# Altium PCB Smart_Farm_PCB.pcbdoc (part 1 of 2)
Units mm, origin at the board's own origin, x right, y up, seen from the top; angles counter-clockwise.
Board outline 238 x 152.38 mm, 2 copper layers (Top Layer, Bottom Layer); 109 components, 81 nets, 498 pads, 409 vias.
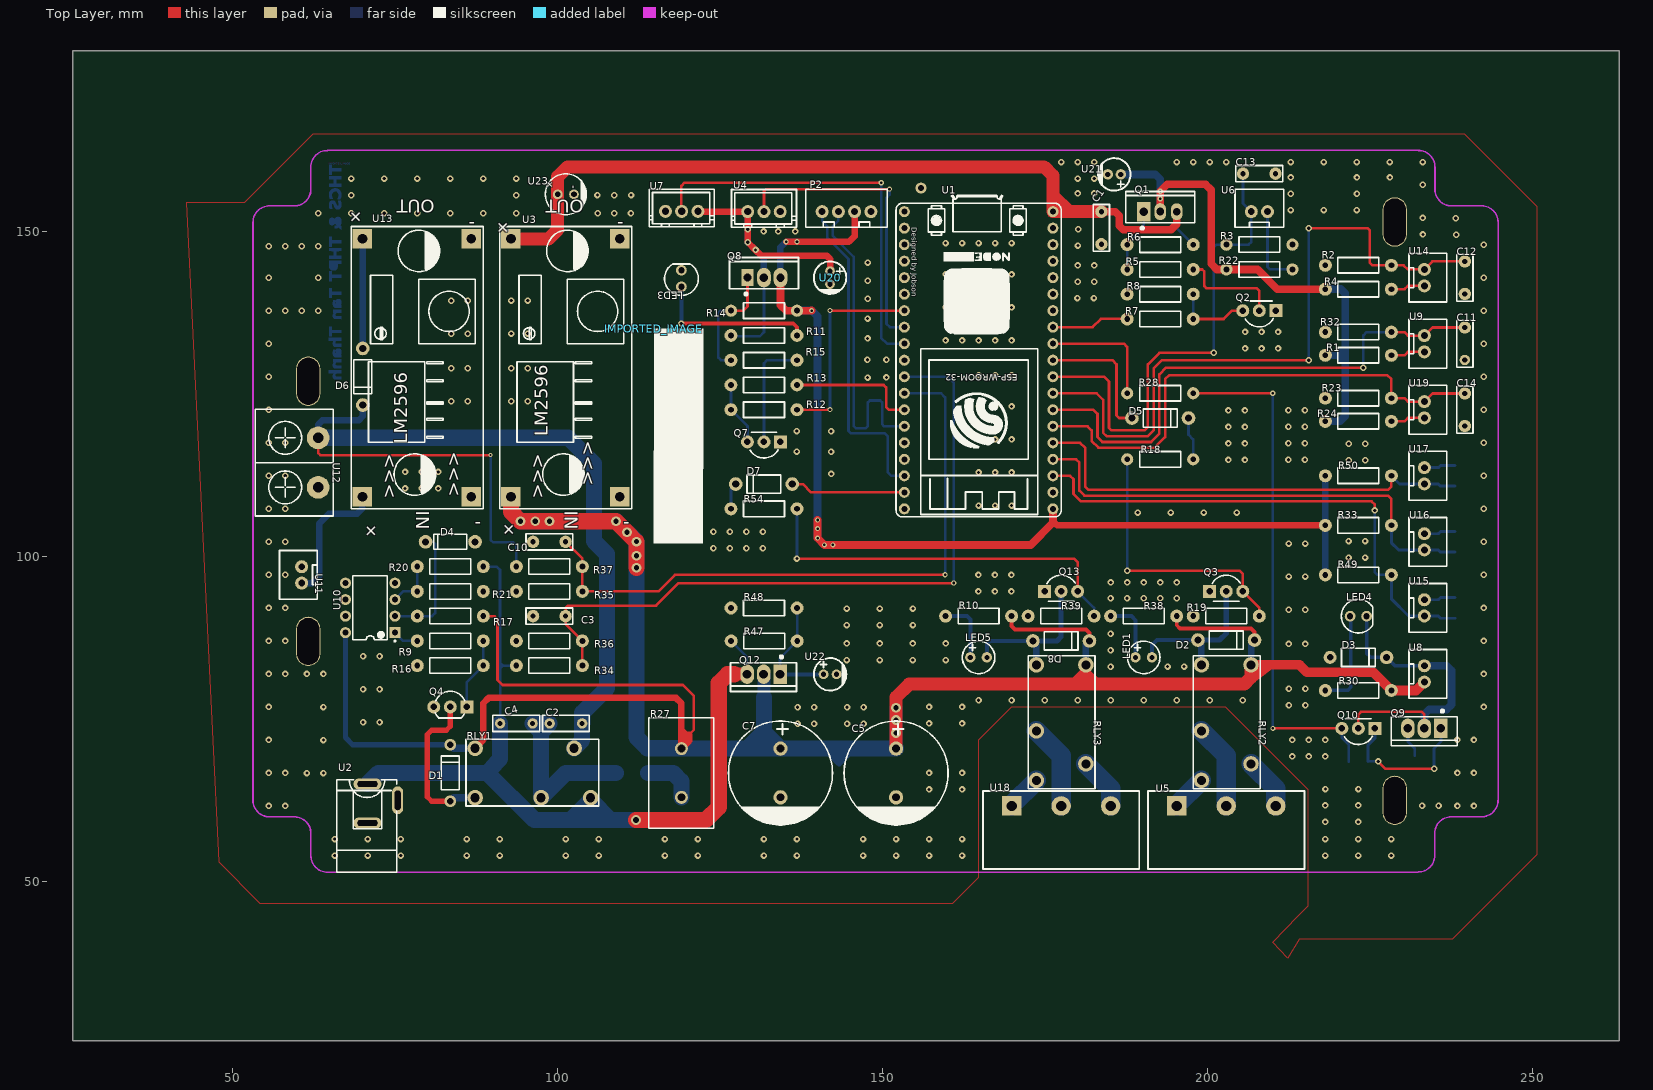
[diagram p0: Top Layer view]
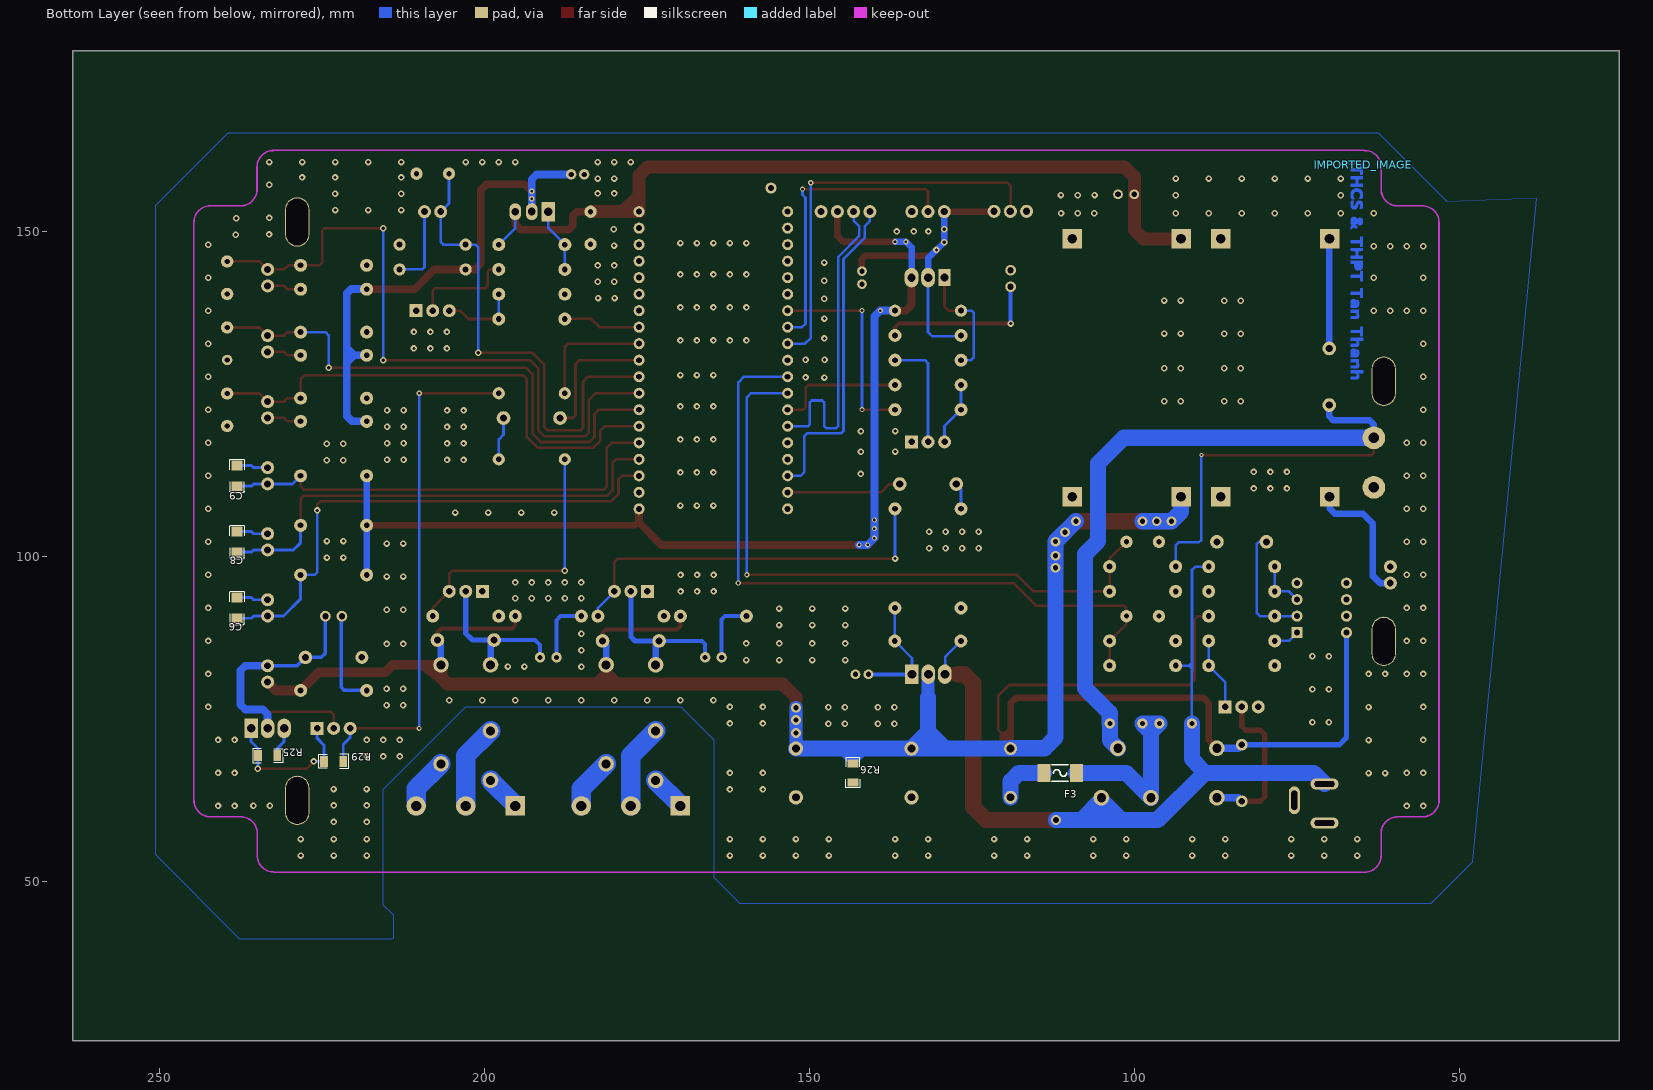
[diagram p1: Bottom Layer view, seen from below]

## Layer stack, top to bottom
Top Layer: signal copper (thickness not stored)
Dielectric: dielectric 0.32, FR-4, Dk 4.8
Bottom Layer: signal copper (thickness not stored)

## Board outline
263.4,25.4 25.4,25.4 25.4,177.78 263.4,177.78

## Components (designator, comment, footprint, x,y, rotation, side; value= is the part's Value field where it differs from the comment)
C1 "100nF" CAP-TH_L7.2-W2.5-P5.00-D0.5#1 183.69,150.48 r90 top
C2 "100nF" CAP-TH_L7.2-W2.5-P5.00-D0.5#1 101.3,74.25 r0 top
C3 "100nF" CAP-TH_L7.2-W2.5-P5.00-D0.5#1 98.76,90.76 r0 top
C4 "100nF" CAP-TH_L7.2-W2.5-P5.00-D0.5#1 93.68,74.25 r180 top
C5 "2200uF" CAP-TH_BD16.0-P7.50-D1.2-FD 152.1,66.63 r270 top
C6 "0.1u" C1206 238.079,92.03 r90 bottom
C7 "2200uF" CAP-TH_BD16.0-P7.50-D1.2-FD 134.32,66.63 r270 top
C8 "0.1u" C1206 238.079,102.19 r90 bottom
C9 "0.1u" C1206 238.079,112.35 r90 bottom
C10 "100nF" CAP-TH_L7.2-W2.5-P5.00-D0.5#1 98.76,102.19 r0 top
C11 "100nF" CAP-TH_L7.2-W2.5-P5.00-D0.5#1 239.603,132.67 r90 top
C12 "100nF" CAP-TH_L7.2-W2.5-P5.00-D0.5#1 239.603,142.83 r90 top
C13 "100nF" CAP-TH_L7.2-W2.5-P5.00-D0.5#1 207.98,158.832 r180 top
C14 "100nF" CAP-TH_L7.2-W2.5-P5.00-D0.5#2 239.603,122.51 r90 top
D1 "1N4007-T" DO-41_BD2.4-L4.7-P8.70-D0.9-RD#1 83.52,66.63 r270 top
D2 "1N4007-T" DO-41_BD2.4-L4.7-P8.70-D0.9-RD#1 202.9,87.077 r180 top
D3 "1N4007" DO-41_BD2.4-L4.7-P8.70-D0.9-RD#2 223.22,84.41 r180 top
D4 "1N5237B" DO-35 83.52,102.19 r180 top
D5 "1N4007" DO-41_BD2.4-L4.7-P8.70-D0.9-RD#1 192.74,121.235 r180 top
D6 "1N4007" DO-41_BD2.4-L4.7-P8.70-D0.9-RD#1 70.058,127.59 r90 top
D7 "1N4007" DO-41_BD2.4-L4.7-P8.70-D0.9-RD#1 131.78,111.08 r0 top
D8 "1N4007-T" DO-41_BD2.4-L4.7-P8.70-D0.9-RD#1 177.5,86.95 r180 top
F3 "SMD1808-5A保险" FUSE-SMD_L6.1-W2.5 111.46,66.63 r180 bottom
IMPORTED_IMAGE "IMPORTED_IMAGE" IMPORTED_IMAGE#1 114.817,134.997 r0 top
IMPORTED_IMAGE "IMPORTED_IMAGE" IMPORTED_IMAGE#2 64.81,160.17 r0 bottom
LED1 "LED-TH-5mm_B" LED-TH_BD5.0_BLUE 190.2,84.41 r90 top
LED3 "LED-TH-5mm_R" LED-TH_BD5.0_RED 119.08,142.703 r180 top
LED4 "LED-TH-5mm_R" LED-TH_BD5.0_RED 223.22,90.76 r90 top
LED5 "LED-TH-5mm_B" LED-TH_BD5.0_BLUE 164.8,84.41 r90 top
P2 "XH-2.54-4P" CONN-TH_4P-P2.50-XH2.54-4P 144.48,152.99 r180 top
Q1 "IRF9Z34" TO-220-3_L10.0-W4.5-P2.54-L 192.74,152.985 r0 top
Q2 "C1815" TO-92-3_L4.8-W3.7-P2.54-L#1 207.98,137.75 r180 top
Q3 "KSC2383YTA" TO-92-3_L4.8-W3.7-P2.54-L#1 202.9,94.57 r0 top
Q4 "2SC2383" TO-92-3_L4.8-W3.7-P2.54-R 83.52,76.79 r0 top
Q7 "C1815" TO-92-3_L4.8-W3.7-P2.54-L#2 131.78,117.562 r180 top
Q8 "IRF9Z34" TO-220-3_L10.0-W4.5-P2.54-L 131.78,142.83 r0 top
Q9 "TIP41C" TO-220-3_L10.0-W4.5-P2.54-T 233.38,73.488 r270 top
Q10 "C1815" TO-92-3_L4.8-W3.7-P2.54-L#3 223.22,73.488 r180 top
Q12 "TIP42C" TO-220-3_L10.0-W4.5-P2.54-T 131.7,81.83 r270 top
Q13 "KSC2383YTA" TO-92-3_L4.8-W3.7-P2.54-L#1 177.5,94.57 r0 top
R1 "33k" R_AXIAL-0.4#1 223.22,130.892 r180 top
R2 "47k" R_AXIAL-0.4#1 223.22,144.735 r0 top
R3 "47k" R_AXIAL-0.4#1 208,147.91 r180 top
R4 "33k" R_AXIAL-0.4#1 223.22,141.052 r180 top
R5 "100" R_AXIAL-0.4#1 192.74,144.095 r180 top
R6 "10k" R_AXIAL-0.4#1 192.74,147.905 r0 top
R7 "3k3" R_AXIAL-0.4#1 192.74,140.285 r180 top
R8 "1k" R_AXIAL-0.4#1 192.74,136.475 r0 top
R9 "3k3" R_AXIAL-0.4#1 83.52,86.95 r0 top
R10 "1k" R_AXIAL-0.4#1 164.8,90.76 r0 top
R11 "220" R_AXIAL-0.4#1 131.78,133.945 r180 top
R12 "1k" R_AXIAL-0.4#1 131.78,122.515 r180 top
R13 "3k3" R_AXIAL-0.4#1 131.78,126.325 r0 top
R14 "10k" R_AXIAL-0.4#1 131.78,137.755 r0 top
R15 "100" R_AXIAL-0.4#1 131.78,130.135 r180 top
R16 "1k" R_AXIAL-0.4#1 83.52,83.14 r0 top
R17 "270" R_AXIAL-0.4#2 83.52,90.76 r180 top
R18 "1k" R_AXIAL-0.4#1 192.74,114.885 r180 top
R19 "2k4" R_AXIAL-0.4#1 202.9,90.76 r0 top
R20 "22k" R_AXIAL-0.4#1 83.52,98.38 r0 top
R21 "33k" R_AXIAL-0.4#2 83.52,94.57 r180 top
R22 "33k" R_AXIAL-0.4#1 208,144.1 r180 top
R23 "47k" R_AXIAL-0.4#1 223.22,124.288 r0 top
R24 "33k" R_AXIAL-0.4#1 223.22,120.732 r180 top
R25 "10k" R1206 233.38,69.297 r180 bottom
R26 "1M" R1206 143.337,66.63 r270 bottom
R27 "Hongzhi" RES-TH_L17.0-W10.0-P7.50-D1.2 119.08,66.63 r90 top
R28 "1k" R_AXIAL-0.4#1 192.74,125.045 r0 top
R29 "3k3" R1206 223.22,68.408 r0 bottom
R30 "330" R_AXIAL-0.4#1 223.22,79.33 r180 top
R32 "47k" R_AXIAL-0.4#1 223.22,134.448 r0 top
R33 "10k" R_AXIAL-0.4#1 223.22,104.73 r180 top
R34 "33k" R_AXIAL-0.4#1 98.76,83.14 r180 top
R35 "10k" R_AXIAL-0.4#1 98.76,94.57 r0 top
R36 "10k" R_AXIAL-0.4#1 98.76,86.95 r0 top
R37 "33k" R_AXIAL-0.4#1 98.76,98.38 r180 top
R38 "1k" R_AXIAL-0.4#1 190.2,90.76 r0 top
R39 "2k4" R_AXIAL-0.4#1 177.5,90.76 r0 top
R47 "100k" R_AXIAL-0.4#1 131.81,86.93 r0 top
R48 "1M" R_AXIAL-0.4#1 131.79,92.01 r180 top
R49 "10k" R_AXIAL-0.4#1 223.22,97.11 r180 top
R50 "10k" R_AXIAL-0.4#1 223.22,112.35 r180 top
R54 "1k" R_AXIAL-0.4#1 131.78,107.27 r0 top
RLY1 "JQ1P-12V-F" RELAY-TH_JQ1P-5V-F 96.22,66.63 r0 top
RLY2 "JQ1P-12V-F" RELAY-TH_JQ1P-5V-F 202.9,74.377 r270 top
RLY3 "JQ1P-12V-F" RELAY-TH_JQ1P-5V-F 177.5,74.377 r270 top
U1 "NodeMCU-32S" NODEMCU-32SLUA 164.8,130.13 r180 top
U2 "POWER-JACK" DC-IN-TH_POWER-JACK 73.106,61.931 r90 top
U3 "LM2596 MODULE" ? 111.46,107.27 r90 top
U4 "XH_2.54_3P" CONN-TH_XH2.54-3P#1 131.78,152.99 r180 top
U5 "KF7.62-3P" CONN-TH_KF7.62-3P 202.9,61.55 r0 top
U6 "XH2.54-2p" CONN-TH_2P-P2.50-XH2.54-2P#1 208,152.99 r180 top
U7 "XH_2.54_3P" CONN-TH_XH2.54-3P#2 119.12,153.04 r180 top
U8 "XH2.54-2p" CONN-TH_2P-P2.50-XH2.54-2P#1 233.38,81.87 r90 top
U9 "XH2.54-2p" CONN-TH_2P-P2.50-XH2.54-2P#1 233.38,132.67 r90 top
U10 "LM358GN" DIP-8_L9.8-W6.6-P2.54-LS7.6-BL 71.201,92.03 r90 top
U11 "XH2.54-2p" CONN-TH_2P-P2.50-XH2.54-2P#2 60.66,97.11 r270 top
U12 "KF7.62" CONN-TH_KF7.62-2P 63.2,114.382 r270 top
U13 "LM2596 MODULE" ? 88.6,107.27 r90 top
U14 "XH2.54-2p" CONN-TH_2P-P2.50-XH2.54-2P#1 233.38,142.83 r90 top
U15 "XH2.54-2p" CONN-TH_2P-P2.50-XH2.54-2P#1 233.38,92.03 r90 top
U16 "XH2.54-2p" CONN-TH_2P-P2.50-XH2.54-2P#1 233.38,102.19 r90 top
U17 "XH2.54-2p" CONN-TH_2P-P2.50-XH2.54-2P#1 233.38,112.35 r90 top
U18 "KF7.62-3P" CONN-TH_KF7.62-3P 177.5,61.55 r0 top
U19 "XH2.54-2p" CONN-TH_2P-P2.50-XH2.54-2P#1 233.38,122.51 r90 top
U20 "100uF" CAP-TH_BD5.0-P2.00-D0.8-FD#1 141.94,142.83 r270 top
U21 "100uF" CAP-TH_BD5.0-P2.00-D0.8-FD#2 185.68,158.72 r180 top
U22 "100uF" CAP-TH_BD5.0-P2.00-D0.8-FD#1 141.95,81.81 r0 top
U23 "220uF" CAP-TH_BD6.3-P2.50-D0.5-FD 101.3,155.657 r0 top

## Footprints (in the part's own frame and the unit in brackets; to place one, negate y for a bottom-side part, rotate by r counter-clockwise, add the part's x,y. Pads: shape width x height; smd on the part's side, far side on the other; paste and mask are expansions set on the pad)
C1206 [mm]
  rect 1.485x1.728 smd paste-100 mask+0.051: 1(1.593,0) 2(-1.593,0)
  silkscreen extent -2.56,-1.09 2.56,1.09
CAP-TH_BD5.0-P2.00-D0.8-FD#1 [mm]
  round 1.3 hole 0.8 paste+0 mask+0.051: 1(-1,0) 2(1,0)
  silkscreen extent -2.5,-2.5 2.5,2.5
CAP-TH_BD5.0-P2.00-D0.8-FD#2 [mm]
  round 1.6 hole 0.8 paste+0 mask+0.051: 1(-1,0) 2(1,0)
  silkscreen extent -2.5,-2.5 2.5,2.5
CAP-TH_BD6.3-P2.50-D0.5-FD [mm]
  round 1.5 hole 0.9 paste+0 mask+0.05: 1(-1.25,0) 2(1.25,0)
  silkscreen extent -3.15,-3.15 3.21,3.15
CAP-TH_BD16.0-P7.50-D1.2-FD [mm]
  round 2.2 hole 1.2 paste+0 mask+0.051: 1(-3.75,0) 2(3.75,0)
  silkscreen extent -8,-8 8,8
CAP-TH_L7.2-W2.5-P5.00-D0.5#1 [mm]
  round 1.6 hole 0.8 paste+0 mask+0.05: 1(-2.5,0) 2(2.5,0)
  silkscreen extent -3.6,-1.25 3.6,1.25
CAP-TH_L7.2-W2.5-P5.00-D0.5#2 [mm]
  round 1.9 hole 0.8 paste+0 mask+0.05: 1(-2.5,0)
  round 1.6 hole 0.8 paste+0 mask+0.05: 2(2.5,0)
  silkscreen extent -3.6,-1.25 3.6,1.25
CONN-TH_2P-P2.50-XH2.54-2P#1 [mm]
  round 1.7 hole 1.05 paste+0 mask+0.05: 1(1.25,0) 2(-1.25,0)
  silkscreen extent -3.75,-3.42 3.75,2.37
CONN-TH_2P-P2.50-XH2.54-2P#2 [mm]
  round 1.7 hole 1.05 paste+0 mask+0.05: 1(1.25,0)
  round 2 hole 1.05 paste+0 mask+0.05: 2(-1.25,0)
  silkscreen extent -3.75,-3.42 3.75,2.37
CONN-TH_4P-P2.50-XH2.54-4P [mm]
  round 2 hole 1.05 paste+0 mask+0.05: 1(3.75,0) 2(1.25,0) 3(-1.25,0) 4(-3.75,0)
  silkscreen extent -6.25,-3.42 6.25,2.37
CONN-TH_KF7.62-2P [mm]
  round 3.5 hole 1.6 paste+0 mask+0.051: 1(-3.81,0) 2(3.81,0)
  silkscreen extent -8.22,-9.7 8.22,2.3
CONN-TH_KF7.62-3P [mm]
  rect 3x3 hole 1.6 paste+0 mask+0.051: 1(-7.62,0)
  round 3 hole 1.6 paste+0 mask+0.051: 2(0,0) 3(7.62,0)
  silkscreen extent -12.03,-9.7 12.03,2.3
CONN-TH_XH2.54-3P#1 [mm]
  round 1.65 hole 1.1 paste+0 mask+0.05: 1(-2.5,0) 2(0,0)
  round 2 hole 1.1 paste+0 mask+0.05: 3(2.5,0)
  silkscreen extent -5,-3.4 5,2.4
CONN-TH_XH2.54-3P#2 [mm]
  round 2 hole 1.1 paste+0 mask+0.05: 1(-2.5,0) 3(2.5,0)
  round 1.65 hole 1.1 paste+0 mask+0.05: 2(0,0)
  silkscreen extent -5,-3.4 5,2.4
DC-IN-TH_POWER-JACK [mm]
  oval 1.7x4.3 hole 0.9 slot 3.1 at 90 deg paste+0 mask+0.051: 1(3.001,2.325) 2(-3,2.325)
  oval 4.3x1.7 hole 0.9 slot 3 at 0 deg paste+0 mask+0.051: 3(0.5,-2.324)
  silkscreen extent -10.6,-2.2 3.65,7.05
DIP-8_L9.8-W6.6-P2.54-LS7.6-BL [mm]
  rect 1.7x1.7 hole 0.9 paste+0 mask+0.051: 1(-3.81,-3.81)
  round 1.5 hole 0.9 paste+0 mask+0.051: 2(-1.27,-3.81) 3(1.27,-3.81) 4(3.81,-3.81) 8(-3.81,3.81)
  round 1.7 hole 0.9 paste+0 mask+0.051: 5(3.81,3.81) 6(1.27,3.81) 7(-1.27,3.81)
  silkscreen extent -5.23,-3.93 4.96,2.65
DO-35 [mm]
  round 2.1 hole 1.1 paste+0 mask+0.051: 1(-3.81,0)
  round 1.905 hole 1.1 paste+0 mask+0.051: 2(3.81,0)
  silkscreen extent -2.54,-1.14 2.54,1.14
DO-41_BD2.4-L4.7-P8.70-D0.9-RD#1 [mm]
  round 1.8 hole 1 paste+0 mask+0.051: 1(-4.35,0) 2(4.35,0)
  silkscreen extent -2.6,-1.4 2.6,1.4
DO-41_BD2.4-L4.7-P8.70-D0.9-RD#2 [mm]
  round 1.8 hole 1 paste+0 mask+0.051: 1(-4.35,0)
  round 2 hole 1 paste+0 mask+0.051: 2(4.35,0)
  silkscreen extent -2.6,-1.4 2.6,1.4
FUSE-SMD_L6.1-W2.5 [mm]
  rect 2x2.8 smd paste+0 mask+0.051: 1(2.5,0) 2(-2.5,0)
  silkscreen extent -1.27,-1.25 1.27,1.25
IMPORTED_IMAGE#1 [mm]
  silkscreen extent 0,-32.99 7.64,0
IMPORTED_IMAGE#2 [mm]
  Top Layer region: 1.914,33 1.055,32.997 1.014,32.987 0.992,32.982 0.972,32.976 0.953,32.971 0.935,32.964 0.918,32.957 0.9,32.95 0.883,32.942 0.865,32.932 0.822,32.908 0.787,32.875 0.774,32.862 0.762,32.848 0.749,32.833 0.738,32.818 0.728,32.804 0.719,32.792 0.714,32.782 0.712,32.776 0.71,32.77 0.705,32.763 0.697,32.749 0.688,32.726 0.68,32.699 0.674,32.671 0.671,32.657 0.667,32.64 0.663,32.624 0.659,32.609 0.65,32.576 0.651,32.404 0.66,32.379 0.663,32.368 0.667,32.354 0.67,32.341 0.672,32.329 0.676,32.307 0.682,32.291 0.688,32.277 0.693,32.26 0.698,32.244 0.704,32.234 0.71,32.226 0.714,32.215 0.725,32.194 0.745,32.161 0.769,32.126 0.788,32.102 0.795,32.09 0.799,32.077 0.801,32.064 0.013,32.061 0,32.043 0,31.84 0.001,31.638 0.01,31.613 1.91,31.613 1.921,31.641 1.921,32.04 1.91,32.061 1.542,32.061 1.174,32.061 1.147,32.08 1.134,32.089 1.119,32.101 1.104,32.115 1.09,32.128 1.059,32.158 1.038,32.202 1.026,32.226 1.023,32.234 1.016,32.258 1.009,32.297 1.002,32.347 1.015,32.441 1.029,32.464 1.036,32.475 1.045,32.486 1.055,32.497 1.064,32.506 1.086,32.525 1.157,32.549 1.535,32.551 1.912,32.552 1.921,32.566 1.921,32.763 1.921,32.802 1.92,32.841 1.92,32.876 1.92,32.908 1.919,32.935 1.919,32.956 1.918,32.972 1.917,32.98
  Top Layer region: 1.907,31.307 1.475,31.304 1.044,31.302 0.997,31.289 0.969,31.281 0.948,31.275 0.932,31.27 0.92,31.265 0.912,31.262 0.892,31.253 0.88,31.246 0.871,31.241 0.863,31.237 0.854,31.232 0.841,31.223 0.826,31.212 0.81,31.2 0.795,31.187 0.78,31.174 0.768,31.163 0.76,31.153 0.751,31.141 0.742,31.129 0.734,31.118 0.726,31.107 0.721,31.098 0.716,31.09 0.713,31.085 0.712,31.081 0.71,31.075 0.704,31.068 0.698,31.058 0.693,31.042 0.688,31.025 0.682,31.011 0.675,30.992 0.669,30.961 0.667,30.945 0.664,30.931 0.661,30.919 0.659,30.913 0.654,30.903 0.648,30.753 0.653,30.72 0.655,30.706 0.657,30.693 0.66,30.681 0.663,30.672 0.668,30.652 0.672,30.627 0.676,30.603 0.682,30.586 0.689,30.572 0.694,30.555 0.698,30.539 0.704,30.529 0.711,30.519 0.715,30.506 0.719,30.492 0.724,30.483 0.733,30.47 0.748,30.448 0.756,30.435 0.765,30.422 0.774,30.41 0.782,30.402 0.794,30.387 0.801,30.373 0.805,30.36 0.79,30.351 0.675,30.351 0.672,30.338 0.67,30.318 0.67,30.272 0.67,30.206 0.67,30.129 0.672,29.932 0.68,29.919 1.909,29.919 1.918,29.932 1.92,30.121 1.92,30.16 1.92,30.197 1.92,30.232 1.92,30.263 1.92,30.29 1.919,30.313 1.919,30.329 1.918,30.339 1.915,30.367 1.179,30.367 1.162,30.376 1.145,30.387 1.127,30.399 1.11,30.414 1.093,30.43 1.078,30.447 1.064,30.464 1.053,30.48 1.044,30.496 1.032,30.521 1.022,30.54 1.019,30.549 1.015,30.565 1.012,30.585 1.009,30.608 1.002,30.662 1.015,30.75 1.03,30.773 1.038,30.784 1.046,30.794 1.055,30.803 1.063,30.811 1.072,30.819 1.082,30.825 1.092,30.831 1.103,30.837 1.13,30.85 1.521,30.852 1.912,30.855 1.916,30.869 1.918,30.89 1.919,30.938 1.92,31.005 1.92,31.085 1.921,31.287
  Top Layer region: 218 vertices and 1 holes, not listed, extent 0.65,28.241 1.939,29.612
  Top Layer region: 1.907,27.983 1.475,27.98 1.044,27.978 0.997,27.965 0.969,27.957 0.948,27.951 0.932,27.946 0.92,27.941 0.912,27.938 0.892,27.929 0.88,27.922 0.871,27.918 0.863,27.914 0.854,27.908 0.841,27.9 0.826,27.889 0.81,27.876 0.795,27.863 0.78,27.85 0.768,27.839 0.76,27.83 0.751,27.817 0.742,27.806 0.734,27.794 0.726,27.784 0.721,27.774 0.716,27.767 0.713,27.761 0.712,27.757 0.71,27.751 0.704,27.745 0.698,27.734 0.693,27.718 0.688,27.701 0.682,27.688 0.675,27.668 0.669,27.637 0.667,27.621 0.663,27.606 0.66,27.594 0.657,27.586 0.651,27.575 0.651,27.38 0.659,27.361 0.666,27.34 0.671,27.314 0.676,27.29 0.682,27.273 0.688,27.259 0.693,27.242 0.698,27.226 0.704,27.216 0.71,27.208 0.712,27.2 0.716,27.188 0.726,27.173 0.735,27.158 0.739,27.15 0.742,27.144 0.748,27.136 0.757,27.126 0.765,27.116 0.772,27.107 0.779,27.099 0.784,27.092 0.789,27.085 0.793,27.079 0.796,27.074 0.798,27.069 0.8,27.065 0.8,27.061 0.8,27.058 0.8,27.055 0.798,27.053 0.796,27.05 0.794,27.049 0.783,27.043 0.007,27.043 0.003,27.023 0.002,26.999 0.001,26.951 0.001,26.888 0.001,26.817 0.001,26.746 0.002,26.683 0.003,26.637 0.005,26.614 0.008,26.598 1.907,26.595 1.918,26.607 1.92,26.797 1.92,26.835 1.92,26.873 1.92,26.907 1.92,26.939 1.92,26.966 1.919,26.989 1.919,27.005 1.918,27.015 1.915,27.043 1.179,27.043 1.162,27.053 1.145,27.063 1.127,27.076 1.11,27.09 1.093,27.106 1.078,27.123 1.064,27.14 1.053,27.157 1.044,27.172 1.032,27.197 1.022,27.216 1.019,27.225 1.015,27.241 1.012,27.262 1.009,27.284 1.002,27.338 1.015,27.427 1.03,27.449 1.038,27.461 1.046,27.471 1.055,27.48 1.063,27.488 1.072,27.495 1.082,27.501 1.092,27.508 1.103,27.513 1.13,27.526 1.521,27.529 1.912,27.531 1.916,27.545 1.918,27.566 1.919,27.614 1.92,27.681 1.92,27.761 1.921,27.964
  Top Layer region: 0.468,26.362 0.463,26.369 0.097,26.369 0.086,26.341 0.087,25.622 0.087,24.904 0.098,24.885 0.463,24.885 0.472,24.898 0.478,25.395 1.91,25.397 1.921,25.425 1.921,25.823 1.91,25.851 0.478,25.853 0.472,26.355
  Top Layer region: 1.917,23.678 1.914,23.698 1.055,23.695 1.014,23.685 0.992,23.68 0.972,23.674 0.953,23.668 0.935,23.662 0.918,23.655 0.9,23.648 0.883,23.639 0.865,23.63 0.822,23.606 0.787,23.572 0.774,23.56 0.762,23.546 0.749,23.531 0.738,23.516 0.728,23.502 0.719,23.49 0.714,23.48 0.712,23.474 0.71,23.468 0.705,23.461 0.697,23.447 0.688,23.424 0.68,23.397 0.674,23.369 0.671,23.355 0.668,23.34 0.664,23.325 0.661,23.312 0.653,23.284 0.651,23.22 0.65,23.206 0.65,23.192 0.65,23.177 0.65,23.163 0.651,23.15 0.651,23.137 0.652,23.127 0.653,23.118 0.655,23.102 0.657,23.087 0.66,23.075 0.662,23.067 0.667,23.048 0.672,23.021 0.674,23.008 0.676,22.995 0.68,22.985 0.689,22.964 0.694,22.947 0.698,22.931 0.705,22.92 0.71,22.914 0.712,22.906 0.717,22.893 0.729,22.87 0.748,22.84 0.773,22.806 0.804,22.763 0.792,22.748 0.678,22.745 0.674,22.732 0.672,22.712 0.671,22.667 0.67,22.603 0.67,22.529 0.669,22.339 0.68,22.311 1.91,22.311 1.921,22.339 1.921,22.738 1.91,22.759 1.542,22.759 1.174,22.759 1.147,22.777 1.134,22.787 1.119,22.799 1.104,22.813 1.09,22.826 1.059,22.856 1.038,22.9 1.026,22.924 1.023,22.932 1.016,22.956 1.009,22.995 1.002,23.045 1.015,23.139 1.029,23.162 1.036,23.172 1.045,23.184 1.055,23.195 1.064,23.204 1.086,23.222 1.157,23.247 1.535,23.249 1.912,23.25 1.921,23.263 1.921,23.46 1.921,23.5 1.92,23.538 1.92,23.574 1.92,23.605 1.919,23.633 1.919,23.654 1.918,23.67
  Top Layer region: 196 vertices and 1 holes, not listed, extent 0.648,20.632 1.939,21.998
  Top Layer region: 0.468,20.448 0.463,20.455 0.097,20.455 0.086,20.427 0.087,19.709 0.087,18.99 0.098,18.971 0.463,18.971 0.472,18.985 0.478,19.481 1.91,19.484 1.921,19.511 1.921,19.909 1.91,19.937 0.478,19.94 0.472,20.441
  Top Layer region: 0.466,17.865 0.461,17.871 0.095,17.868 0.091,17.854 0.09,17.835 0.09,17.788 0.089,17.715 0.089,17.621 0.088,17.511 0.088,17.388 0.088,17.257 0.087,17.122 0.087,16.987 0.087,16.856 0.087,16.734 0.088,16.624 0.088,16.531 0.089,16.459 0.089,16.411 0.09,16.393 0.093,16.387 0.468,16.387 0.472,16.395 0.473,16.417 0.474,16.471 0.475,16.549 0.475,16.643 0.475,16.691 0.475,16.737 0.475,16.778 0.476,16.814 0.476,16.845 0.477,16.869 0.477,16.884 0.478,16.891 0.481,16.899 1.91,16.899 1.921,16.92 1.92,17.121 1.92,17.162 1.92,17.201 1.919,17.236 1.919,17.268 1.918,17.294 1.918,17.315 1.917,17.329 1.916,17.336 1.912,17.35 1.195,17.352 0.478,17.355 0.472,17.859
  Top Layer region: 128 vertices and 1 holes, not listed, extent 0.086,14.741 1.921,16.23
  Top Layer region: 0.098,14.417 0.089,14.404 0.087,14.195 0.086,13.986 0.098,13.964 0.793,13.964 0.796,13.952 0.796,13.942 0.797,13.919 0.797,13.885 0.798,13.84 0.798,13.787 0.798,13.726 0.798,13.66 0.797,13.589 0.796,13.238 0.445,13.237 0.095,13.236 0.087,13.222 0.087,13.02 0.087,12.979 0.088,12.922 0.088,12.872 0.089,12.834 0.09,12.81 0.09,12.803 0.092,12.788 1.914,12.788 1.917,12.808 1.919,12.831 1.92,12.88 1.92,12.947 1.921,13.025 1.921,13.222 1.912,13.236 1.551,13.237 1.19,13.238 1.188,13.589 1.188,13.66 1.188,13.742 1.188,13.815 1.188,13.875 1.189,13.919 1.189,13.946 1.19,13.952 1.193,13.964 1.91,13.964 1.921,13.986 1.92,14.195 1.918,14.404 1.909,14.417
  Top Layer region: 0.468,12.549 0.463,12.556 0.097,12.556 0.086,12.528 0.087,11.809 0.087,11.091 0.098,11.072 0.463,11.072 0.472,11.085 0.478,11.582 1.194,11.583 1.91,11.585 1.921,11.612 1.921,12.01 1.91,12.038 0.478,12.04 0.472,12.542
  Top Layer region: 283 vertices and 2 holes, not listed, extent 0.067,7.996 1.939,9.938
  Top Layer region: 324 vertices and 0 holes, not listed, extent 0.067,5.471 1.939,6.815
  Top Layer region: 286 vertices and 0 holes, not listed, extent 0.067,3.609 1.939,5.249
  Top Layer region: 1.914,3.339 1.909,3.345 0.098,3.345 0.089,3.332 0.087,3.123 0.086,2.914 0.098,2.892 0.793,2.892 0.796,2.88 0.796,2.87 0.797,2.848 0.797,2.813 0.798,2.768 0.798,2.715 0.798,2.654 0.798,2.588 0.797,2.517 0.796,2.166 0.095,2.164 0.087,2.15 0.087,1.948 0.087,1.907 0.088,1.85 0.088,1.801 0.089,1.762 0.09,1.738 0.09,1.731 0.092,1.716 1.914,1.716 1.917,1.736 1.919,1.759 1.92,1.808 1.92,1.875 1.921,1.953 1.921,2.15 1.912,2.164 1.19,2.166 1.188,2.517 1.188,2.588 1.188,2.67 1.188,2.743 1.188,2.803 1.189,2.848 1.189,2.874 1.19,2.88 1.193,2.892 1.91,2.892 1.921,2.914 1.92,3.123 1.918,3.332
  Top Layer region: 0.468,1.477 0.463,1.484 0.097,1.484 0.086,1.456 0.087,0.737 0.087,0.019 0.098,0 0.463,0 0.472,0.013 0.478,0.51 1.91,0.513 1.921,0.54 1.921,0.938 1.91,0.966 0.478,0.969 0.472,1.47
LED-TH_BD5.0_BLUE [mm]
  round 1.4 hole 0.8 paste+0 mask+0.051: 1(0,1.27) 2(0,-1.27)
  silkscreen extent -2.5,-2.5 2.5,2.5
LED-TH_BD5.0_RED [mil]
  round 65 hole 38 paste+0 mask+2: 1(0,50) 2(0,-50)
  silkscreen extent -102,-88 102,102
NODEMCU-32SLUA [mil]
  round 60 hole 36 paste+0 mask+4: 1(-450,-900) 2(-450,-800) 3(-450,-700) 4(-450,-600) 5(-450,-500) 7(-450,-300) 8(-450,-200) 9(-450,-100) 10(-450,0) 11(-450,100) 12(-450,200) 13(-450,300) 14(-450,400) 15(-450,500) 16(-450,600) 17(-450,700) 18(-450,800) 19(-450,900) 20(450,-900) 21(450,-800) 22(450,-700) 23(450,-600) 24(450,-500) 25(450,-400) 26(450,-300) 27(450,-200) 28(450,-100) 29(450,0) 30(450,100) 31(450,200) 32(450,300) 33(450,400) 34(450,500) 35(450,600) 36(450,700) 37(450,800)
  round 66.93 hole 35.98 paste+0 mask+4.02: 6(-449.99,-399.99) 38(450.01,900)
  silkscreen extent -500,-999 500,949
R1206 [mm]
  rect 1.208x1.701 smd paste-100 mask+0.051: 1(1.479,0) 2(-1.479,0)
  silkscreen extent -2.31,-1.08 2.31,1.08
R_AXIAL-0.4#1 [mil]
  round 74 hole 35.4 paste+0 mask+2: 1(-200,0) 2(200,0)
  silkscreen extent -124,-47 124,47
R_AXIAL-0.4#2 [mil]
  round 78.74 hole 35.39 paste+0 mask+2.01: 1(-200,0)
  round 74 hole 35.4 paste+0 mask+2: 2(200,0)
  silkscreen extent -124,-47 124,47
RELAY-TH_JQ1P-5V-F [mm]
  round 1.9 hole 1.4 paste+0 mask+0.051: 1(-8.89,-3.81) 2(-8.89,3.81) 3(6.35,3.81) 4(1.27,-3.81) 5(8.89,-3.81)
  silkscreen extent -10.29,-5.08 10.16,5.21
RES-TH_L17.0-W10.0-P7.50-D1.2 [mm]
  round 2 hole 1.2 paste+0 mask+0.051: 1(-3.749,0) 2(3.749,0)
  silkscreen extent -8.5,-5 8.5,5
TO-92-3_L4.8-W3.7-P2.54-L#1 [mm]
  rect 1.8x1.8 hole 1 paste+0 mask+0.051: 1(-2.54,0)
  round 1.8 hole 1 paste+0 mask+0.051: 2(0,0) 3(2.54,0)
  silkscreen extent -2.17,-1.5 2.14,2.48
TO-92-3_L4.8-W3.7-P2.54-L#2 [mm]
  rect 2x2 hole 1 paste+0 mask+0.051: 1(-2.54,0)
  round 1.8 hole 1 paste+0 mask+0.051: 2(0,0) 3(2.54,0)
  silkscreen extent -2.17,-1.5 2.14,2.48
TO-92-3_L4.8-W3.7-P2.54-L#3 [mm]
  rect 1.8x1.8 hole 1 paste+0 mask+0.051: 1(-2.54,0)
  round 1.8 hole 1 paste+0 mask+0.051: 2(0,0)
  round 2 hole 1 paste+0 mask+0.051: 3(2.54,0)
  silkscreen extent -2.17,-1.5 2.14,2.48
TO-92-3_L4.8-W3.7-P2.54-R [mm]
  rect 1.8x1.8 hole 1 paste+0 mask+0.051: 1(2.54,0)
  round 1.8 hole 1 paste+0 mask+0.051: 2(0,0) 3(-2.54,0)
  silkscreen extent -2.3,-1.7 2.2,2.41
TO-220-3_L10.0-W4.5-P2.54-L [mm]
  rect 1.8x2.6 hole 1.2 paste+0 mask+0.051: 1(-2.54,0.005)
  oval 1.8x2.6 hole 1.2 paste+0 mask+0.051: 2(0,0.005) 3(2.54,-0.005)
  silkscreen extent -5.3,-2.73 5.3,3.09
TO-220-3_L10.0-W4.5-P2.54-T [mm]
  rect 2.5x2 hole 1.3 paste+0 mask+0.051: 1(0,2.54)
  oval 2.5x2 hole 1.3 paste+0 mask+0.051: 2(0,0) 3(0,-2.54)
  silkscreen extent -2.86,-5.08 2.67,5.08
? [mm]
  rect 2.7x2.7 hole 1.5 paste+0 mask+0.102: 1(1.86,18.6)
  rect 3x3 hole 1.5 paste+0 mask+0.102: 2(1.86,1.86) 4(41.54,1.86)
  rect 3x2.7 hole 1.5 paste+0 mask+0.102: 3(41.54,18.6)
  silkscreen extent 0,0 43.43,20.32

## Free pads (board coordinates)
  oval 3.7x7.6 hole 3.4 slot 7.2 at 90 deg paste+0 mask+0.051: 1(61.671,86.866) 1(61.671,126.892) 1(228.825,62.412) 1(228.825,151.398)
  rect 3x3 hole 1.5 paste+0 mask+0.102: 1(70,109.129) 1(70,148.809) 1(92.86,109.129) 1(92.86,148.809)
  round 2 hole 0.899 paste+0 mask+0.051: 1(78.44,98.38) 1(78.44,90.76) 1(78.44,94.57) 1(78.44,83.14) 1(78.44,86.95) 1(88.6,83.14) 1(88.6,86.95) 1(88.6,98.38) 1(93.68,83.14) 1(93.68,86.95) 1(93.68,94.57) 1(93.68,98.38) 1(103.84,98.38) 1(103.84,83.14) 1(103.84,86.95) 1(103.84,94.57) 1(126.698,130.135) 1(126.7,122.515) 1(126.7,126.325) 1(126.7,133.945) 1(126.7,107.27) 1(126.71,92.01) 1(126.73,86.93) 1(136.86,122.515) 1(136.86,107.27) 1(136.86,126.325) 1(136.86,130.135) 1(136.86,133.945) 1(136.87,92.01) 1(136.89,86.93) 1(159.72,90.76) 1(169.88,90.76) 1(172.42,90.76) 1(182.58,90.76) 1(185.12,90.76) 1(187.66,147.905) 1(187.66,136.475) 1(187.66,140.285) 1(187.66,144.095) 1(195.28,90.76) 1(197.82,90.76) 1(197.82,136.475) 1(197.82,140.285) 1(197.82,144.095) 1(197.82,147.905) 1(207.98,90.76) 1(218.14,79.33) 1(218.14,130.892) 1(218.14,104.73) 1(218.14,97.11) 1(218.14,112.35) 1(218.14,120.732) 1(218.14,124.288) 1(218.14,134.448) 1(218.14,141.052) 1(218.14,144.735) 1(228.3,97.11) 1(228.3,120.732) 1(228.3,130.892) 1(228.3,141.052) 1(228.3,104.73) 1(228.3,124.288) 1(228.3,79.33) 1(228.3,112.35) 1(228.3,134.448) 1(228.3,144.735)
  rect 2x2 hole 1 paste+0 mask+0.051: 1(86.06,76.79) 1(174.96,94.57) 1(200.36,94.57) 1(210.52,137.75) 1(225.76,73.488)
  round 2.4 hole 1.4 paste+0 mask+0.051: 1(87.33,62.82) 1(87.33,70.44) 1(97.49,62.82) 1(102.57,70.44) 1(105.11,62.82) 1(173.69,65.487) 1(173.69,73.107) 1(173.69,83.267) 1(181.31,83.267) 1(181.31,68.027) 1(199.09,83.267) 1(199.09,65.487) 1(199.09,73.107) 1(206.71,83.267) 1(206.71,68.027)
  round 1.9 hole 0.8 paste+0 mask+0.05: 1(96.26,90.76) 1(96.26,102.19) 1(183.69,147.98) 1(210.48,158.832) 1(239.603,140.33) 2(101.259,90.76) 2(101.26,102.19) 2(183.69,152.98) 2(205.48,158.832) 2(239.603,125.01) 2(239.603,135.17) 2(239.603,145.329)
  round 1.6 hole 0.8 paste+0 mask+0.051: 1(119.08,141.433) 1(163.53,84.41) 1(166.07,84.41) 1(188.93,84.41) 1(191.47,84.41) 1(221.95,90.76) 1(224.49,90.76)
  round 2 hole 1.1 paste+0 mask+0.05: 1(119.121,153.041)
  rect 2.1x3 hole 1.3 paste+0 mask+0.051: 1(134.28,81.83) 1(190.2,152.99) 1(235.92,73.488)
  round 2.3 hole 1.4 paste+0 mask+0.051: 1(181.31,83.267)
  round 2 hole 1.05 paste+0 mask+0.05: 2(60.66,95.84) 2(131.78,152.99) 2(134.28,152.99) 2(206.75,152.99) 2(209.25,152.99) 2(233.38,80.62) 2(233.38,83.12) 2(233.38,90.78) 2(233.38,93.28) 2(233.38,100.94) 2(233.38,103.44) 2(233.38,111.1) 2(233.38,113.6) 2(233.38,121.26) 2(233.38,123.76) 2(233.38,131.42) 2(233.38,133.92) 2(233.38,141.56) 2(233.38,144.1)
  round 2.1 hole 1.1 paste+0 mask+0.051: 2(70.058,123.239) 2(70.058,131.941) 2(79.71,102.19) 2(127.43,111.08) 2(136.131,111.08) 2(173.149,86.95) 2(181.851,86.95) 2(188.389,121.235) 2(197.091,121.235) 2(198.549,87.077) 2(207.251,87.077) 2(227.571,84.41)
  round 1.5 hole 0.8 paste+0 mask+0.051: 2(140.949,81.81) 2(141.94,143.83) 2(141.94,141.83) 2(142.95,81.81)
  oval 2.1x3 hole 1.3 paste+0 mask+0.051: 3(129.2,81.83) 3(131.74,81.83) 3(131.78,142.84) 3(134.32,142.83) 3(230.84,73.488) 3(233.38,73.488)
  round 1.7 hole 0.9 paste+0 mask+0.051: 4(67.391,88.22) 4(75.011,90.76) 4(75.011,93.3) 4(75.011,95.84)
  round 2 hole 1 paste+0 mask+0.051: 4(80.98,76.79) 4(83.52,76.79) 4(129.24,117.562) 4(131.78,117.562) 4(177.5,94.57) 4(180.04,94.57) 4(202.9,94.57) 4(205.44,94.57) 4(205.44,137.75) 4(207.98,137.75) 4(223.22,73.488)
  round 1.7 hole 0.914 paste+0 mask+0.102: 20(153.37,112.35) 20(153.37,109.81) 20(153.37,132.67) 20(153.37,119.97) 20(153.37,122.51) 20(153.37,125.05) 20(153.37,127.59) 20(153.37,114.89) 20(153.37,117.43) 20(153.37,130.13) 20(153.37,135.21) 20(153.37,137.75) 20(153.37,140.29) 20(153.37,142.83) 20(153.37,145.37) 20(153.37,147.91) 20(153.37,150.45) 20(153.37,152.99) 20(155.94,156.61) 20(176.23,107.27) 20(176.23,109.81) 20(176.23,112.35) 20(176.23,114.89) 20(176.23,117.43) 20(176.23,119.97) 20(176.23,119.97) 20(176.23,122.51) 20(176.23,125.05) 20(176.23,127.59) 20(176.23,130.13) 20(176.23,132.67) 20(176.23,135.21) 20(176.23,137.75) 20(176.23,142.83) 20(176.23,145.37) 20(176.23,147.91) 20(176.23,150.45) 20(176.24,152.98)

## Via types
v1: diameter 1, hole 0.5, Top Layer to Bottom Layer, tented both sides, 377 vias
v2: diameter 0.8, hole 0.4, Top Layer to Bottom Layer, tented both sides, 18 vias
v3: diameter 1.5, hole 0.8, Top Layer to Bottom Layer, tented both sides, 12 vias
v4: diameter 0.62, hole 0.31, Top Layer to Bottom Layer, tented both sides, 1 vias
v5: diameter 1.5, hole 0.9, Top Layer to Bottom Layer, tented both sides, 1 vias

## Nets (pads, with @x,y where several pads share a name; then routed paths per layer and width w, separated by ;. In a path a pad name is that pad's centre, name@x,y a point inside that pad or via, vN(x,y) a via of type N, cw(c..) or ccw(c..) an arc to the next point about the centre after c; other vN are vias at no path point)
3V3: P2.3 pad.1@218.14,97.11 pad.1@218.14,104.73 pad.1@218.14,112.35 pad.3@134.32,142.83 pad.20@176.23,107.27 Q8.3 R14.2 R33.2 R49.2 R50.2 U1.19 | length 174.7
  Top Layer w1: v2(135.181,148.37) v2(136.86,148.37) 144.861,148.37 145.73,149.241 P2.3@145.73,152.99 ; U1.19@176.23,107.27 176.23,105.365 176.865,104.73 R33.2@218.14,104.73
  Top Layer w1.2: pad.3@134.32,142.83 134.32,138.639 135.204,137.755 R14.2@136.86,137.755 136.875,137.74 138.42,137.74 139.08,137.74 v2(139.11,137.77) ; v2@140.03,103.86 v2(140.03,104.23) ; v2(140.03,105.55) v2(140.03,104.23) ; U1.19@176.23,107.27 176.23,105.111 172.829,101.71 141.079,101.71 v2(140.03,102.759) v2(140.03,104.23)
  Bottom Layer w1: pad.3@134.32,142.83 134.32,147.511 v2(135.181,148.37) v2(136.86,148.37) ; R49.2@218.14,97.11 R33.2@218.14,104.73 R50.2@218.14,112.35
  Bottom Layer w1.2: R14.2@136.86,137.755 136.874,137.77 v2(139.11,137.77) 140.03,136.85 v2(140.03,102.759) v2(141.069,101.72) v2(142.39,101.72)
BATSEN: C10.2 pad.1@103.84,94.57 pad.1@103.84,98.38 pad.2@101.26,102.19 pad.20@153.37,125.05 R35.2 R37.1 U1.31 | length 99.4
  Top Layer w0.4: C10.2@101.26,102.19 103.84,99.61 R37.1@103.84,98.38 R35.2@103.84,94.57 115.54,94.57 118.09,97.12 v2(159.65,97.12)
  Bottom Layer w0.4: U1.31@153.37,125.05 159.03,125.05 159.65,124.43 v2(159.65,97.12)
BUTTON1: C6.2 pad.1@228.3,97.11 pad.2@233.38,90.78 pad.20@176.23,112.35 R49.1 U1.17 U15.2 | length 80.5
  Top Layer w0.4: U1.17@176.23,112.35 178.897,112.35 179.405,111.842 179.405,109.556 180.548,108.413 225.252,108.413 225.76,107.905 v1(225.76,107.016)
  Bottom Layer w0.4: v1(225.76,107.016) 225.76,97.491 226.141,97.11 R49.1@228.3,97.11
  Bottom Layer w0.45: R49.1@228.3,97.11 228.3,93.427 230.947,90.78 U15.2@233.38,90.78 235.519,90.78 235.862,90.437 C6.2@238.079,90.437
BUTTON2: C8.2 pad.1@228.3,104.73 pad.2@233.38,100.94 pad.20@176.23,114.89 R33.1 U1.16 U16.2 | length 74.2
  Top Layer w0.4: U1.16@176.23,114.89 179.786,114.89 180.294,114.382 180.294,110.064 181.056,109.302 227.792,109.302 228.3,108.794 R33.1@228.3,104.73
  Bottom Layer w0.45: R33.1@228.3,104.73 228.3,102.063 229.423,100.94 U16.2@233.38,100.94 235.519,100.94 235.862,100.597 C8.2@238.079,100.597
BUTTON3: C9.2 pad.1@228.3,112.35 pad.2@233.38,111.1 pad.20@176.23,117.43 R50.1 U1.15 U17.2 | length 70.9
  Top Layer w0.4: U1.15@176.23,117.43 180.421,117.43 181.183,116.668 181.183,110.699 181.691,110.191 227.792,110.191 228.3,110.699 R50.1@228.3,112.35
  Bottom Layer w0.45: R50.1@228.3,112.35 229.55,111.1 U17.2@233.38,111.1 235.519,111.1 235.862,110.757 C9.2@238.079,110.757
D1_2: D1.2 pad.1@87.33,62.82 pad.4@83.52,76.79 Q4.2 RLY1.1 | length 24.5
  Top Layer w0.8: D1.2@83.52,62.279 80.66,62.279 79.979,62.96 79.979,72.571 80.609,73.201 82.89,73.201 83.52,73.831 Q4.2@83.52,76.79
  Bottom Layer w1.2: D1.2@83.52,62.28 84.06,62.82 RLY1.1@87.33,62.82
D4_2: D4.2 pad.1@78.44,90.76 pad.2@79.71,102.19 pad.4@75.011,90.76 R17.2 U10.2 | length 18.6
  Bottom Layer w0.4: U10.2@75.011,90.76 R17.2@78.44,90.76 80.711,90.76 81.191,91.24 81.191,101.85 80.85,102.19 D4.2@79.71,102.19